# Altium PCB Potencia.PcbDoc
Units mm, origin at the board's own origin, x right, y up, seen from the top; angles counter-clockwise.
Board outline 76.45 x 85.34 mm, 2 copper layers (Top Layer, Bottom Layer); 36 components, 18 nets, 89 pads, 0 vias.
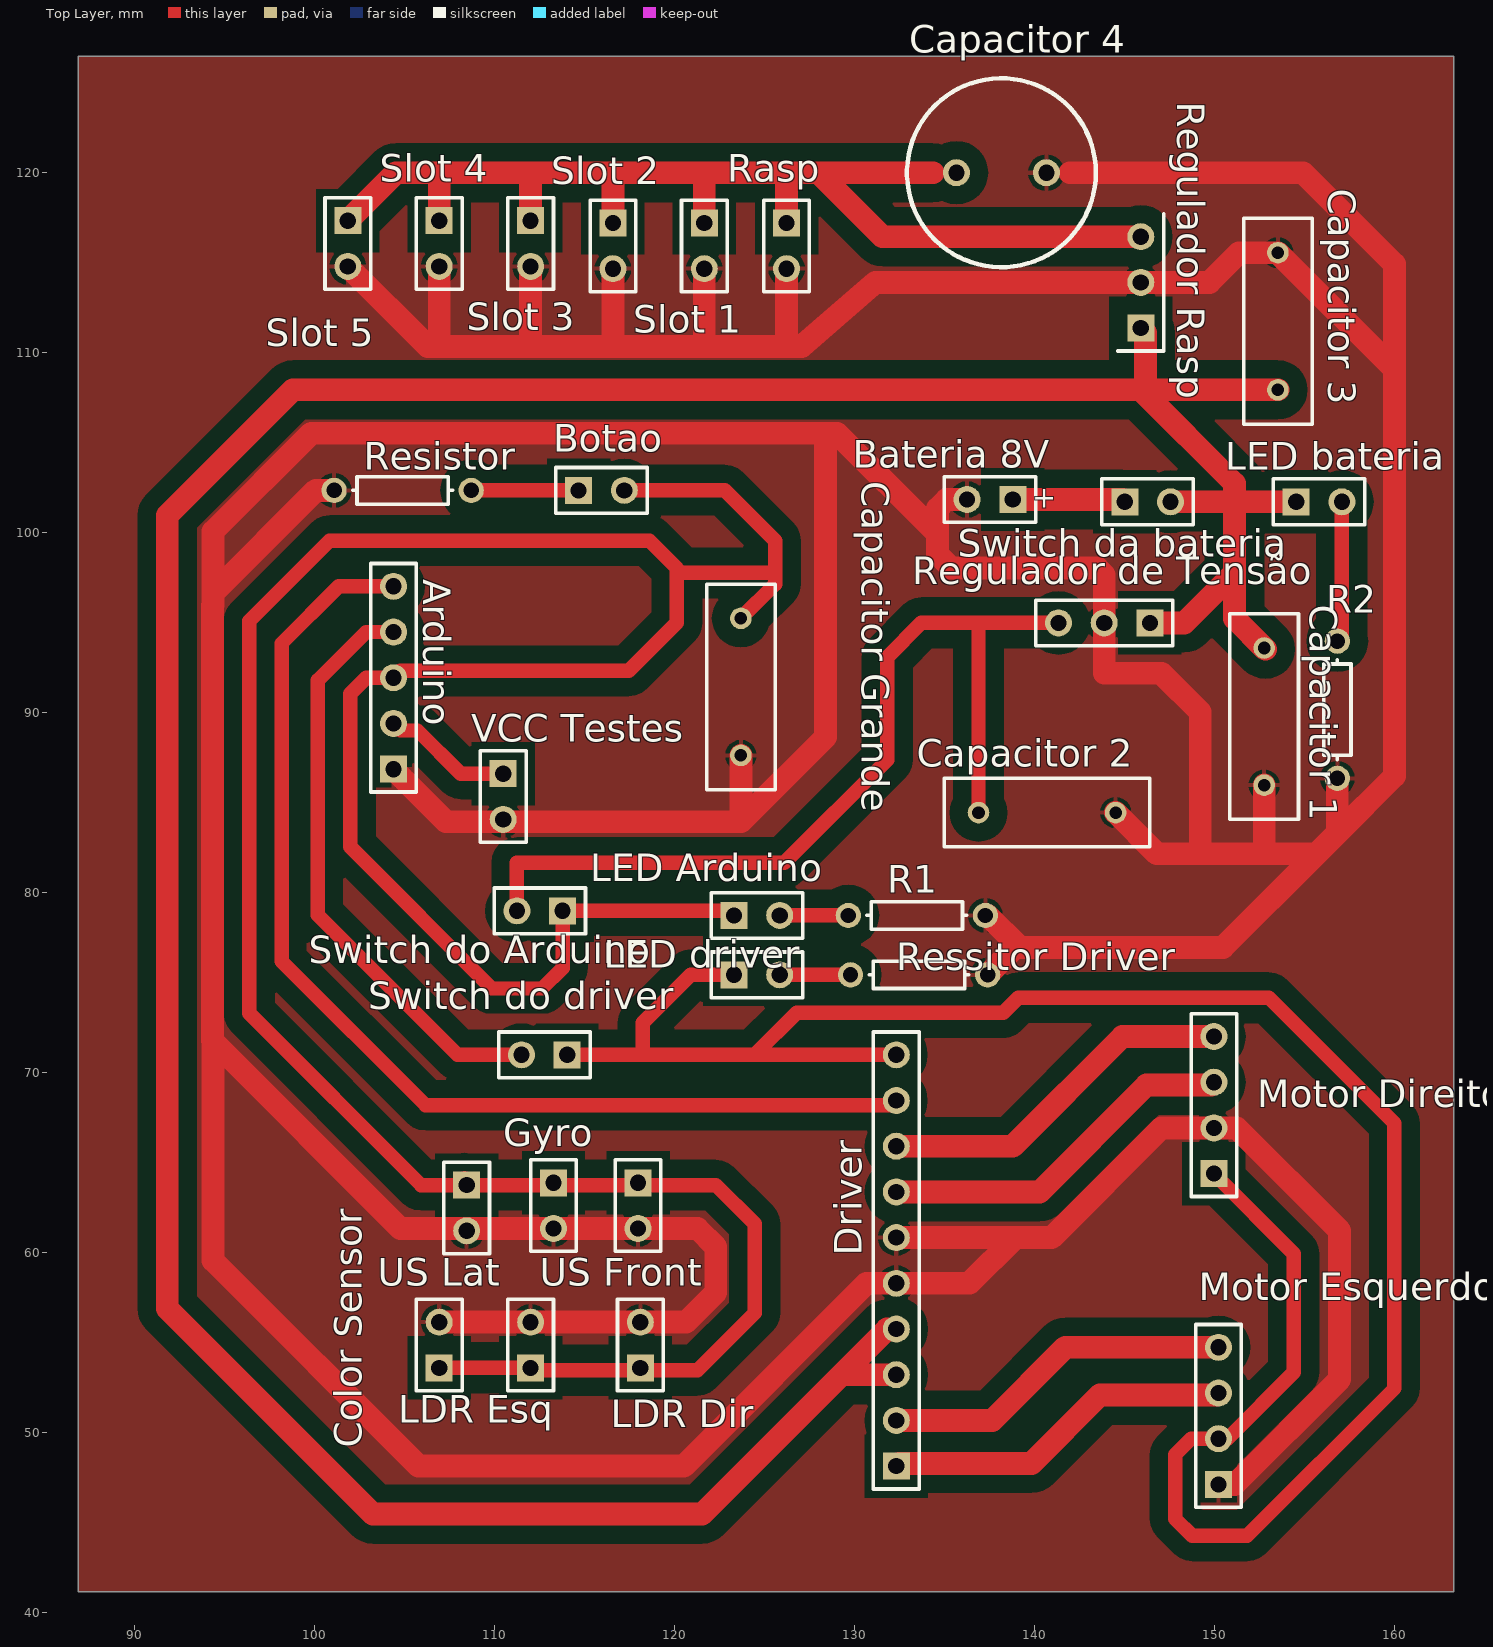
[diagram p0: Top Layer view]
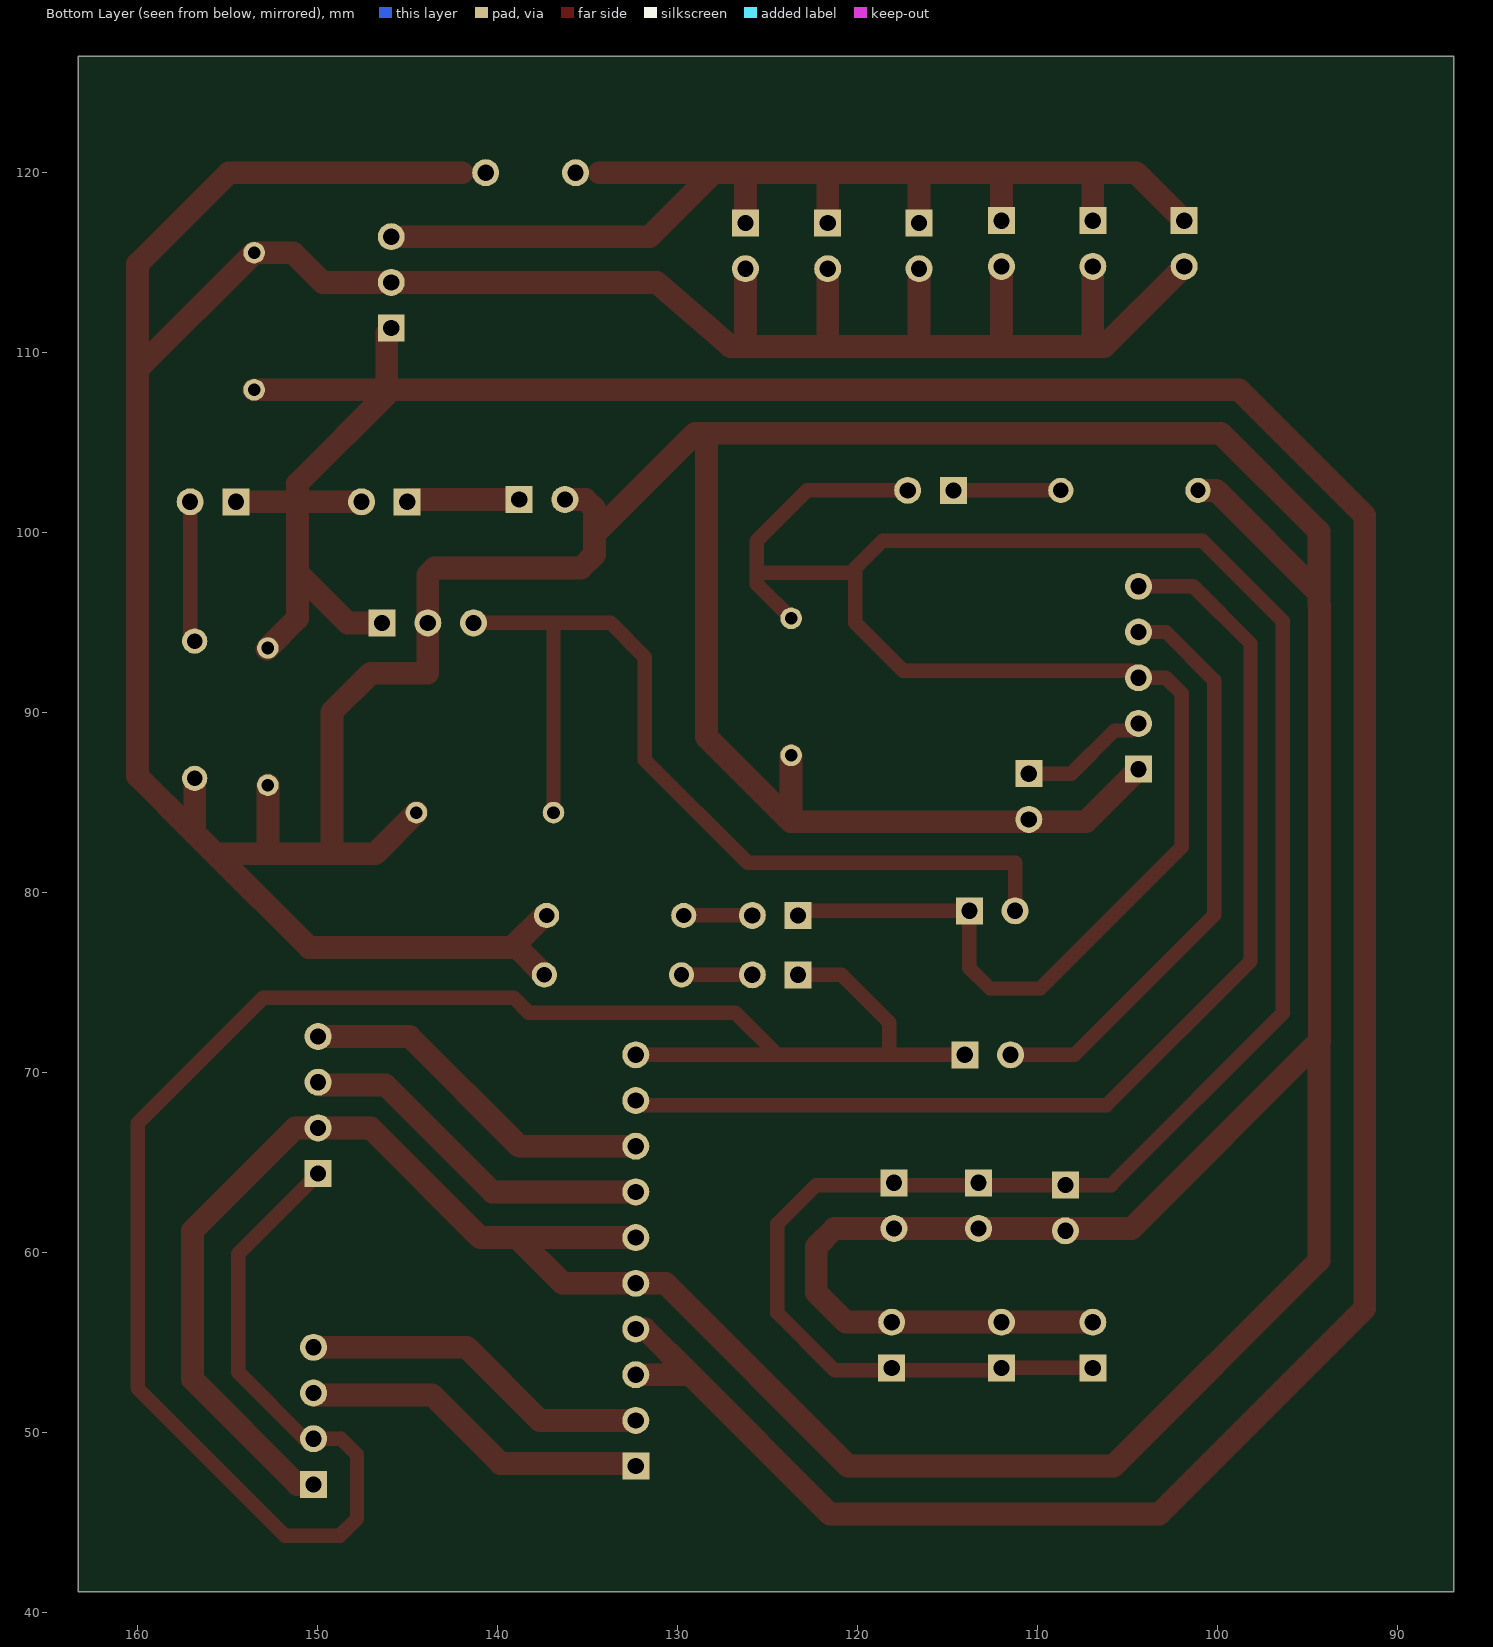
[diagram p1: Bottom Layer view, seen from below]

## Layer stack, top to bottom
Top Solder: solder mask 0.0102, Solder Resist, Dk 3.5
Top Layer: signal copper 0.0356
Dielectric 1: dielectric 0.32, FR-4, Dk 4.8
Bottom Layer: signal copper 0.0356
Bottom Solder: solder mask 0.0102, Solder Resist, Dk 3.5

## Board outline
86.868,41.148 163.322,41.148 163.322,126.492 86.868,126.492

## Design rules (kind name [scope] priority, off if disabled: settings)
Clearance [All] p1: gap=1
PolygonConnect [All] p1: connectstyle=Relief reliefconductorwidth=0.254 reliefentries=4 polygonreliefangle="90 Angle" airgapwidth=0.254
RoutingLayers [All] p1: top layer_v5=TRUE bottom layer_v5=FALSE
RoutingVias [All] p1: holewidth=0.711 width=1.27 viastyle="Through Hole" minholewidth=0.711 minwidth=1.27 maxholewidth=0.711 maxwidth=1.27
SolderMaskExpansion [All] p1: expansion=0.102
UnpouredPolygon [All] p1: allowunpoured=FALSE
Width [All] p1: maxlimit=1.27 minlimit=0.254 preferedwidth=0.254 bottomlayer_maxwidth=0.254 minimp=50.000000 maximp=50.000000 favimp=50.000000
28 further rules are at their usual default settings.

## Classes and differential pairs
component class Potencia: Arduino "Bateria 8V" Botao "Capacitor 1" "Capacitor 2" "Capacitor 3" "Capacitor 4" "Capacitor Grande" "LED Arduino" "LED bateria" "LED driver" "Left Motor" "Motor Direito" "Motor Esquerdo" R1 R2 Rasp "Regulador de Tensão" "Regulador Rasp" Resistor "Ressitor Driver" "Right Motor" "Slot 1" "Slot 2" "Slot 3" "Slot 4" "Slot 5" "Switch da bateria" "Switch do Arduino" "Switch do driver" "VCC Testes"

## Components (designator, comment, footprint, x,y, rotation, side; value= is the part's Value field where it differs from the comment)
Arduino "Header 5" HDR1X5 104.394,86.868 r90 top (schematic designator "Alimentacao Arduino")
"Bateria 8V" "Battery" BAT-2 137.541,101.854 r180 top
Botao "Header 2" HDR1X2 114.681,102.362 r0 top (schematic designator Botão)
"Capacitor 1" "Cap" RAD-0.3 152.781,89.789 r270 top
"Capacitor 2" "Cap" RAD-0.3 140.716,84.455 r0 top
"Capacitor 3" "Cap" RAD-0.3 153.543,111.76 r90 top
"Capacitor 4" "Cap" RB5-10.5 138.176,120.015 r0 top
"Capacitor Grande" "Cap" RAD-0.3 123.698,91.44 r270 top (schematic designator "Capacitor Parrudao")
"Color Sensor" "Header 2" HDR1X2 106.934,53.594 r90 top (schematic designator "Sensor de Cores")
Driver "Header 10" HDR1X10 132.334,48.133 r90 top
Gyro "Header 2" HDR1X2 113.284,63.881 r270 top (schematic designator Giroscópio)
"LDR Dir" "Header 2" HDR1X2 118.11,53.594 r90 top (schematic designator "LDR Direito")
"LDR Esq" "Header 2" HDR1X2 112.014,53.594 r90 top (schematic designator "LDR Esquerdo")
"LED Arduino" "Header 2" HDR1X2 123.317,78.74 r0 top
"LED bateria" "Header 2" HDR1X2 154.559,101.727 r0 top
"LED driver" "Header 2" HDR1X2 123.317,75.438 r0 top
"Motor Direito" "Header 4" HDR1X4 149.987,64.389 r90 top
"Motor Esquerdo" "Header 4" HDR1X4 150.241,47.117 r90 top
R1 "Res1" AXIAL-0.3 133.477,78.74 r0 top
R2 "Res1" AXIAL-0.3 156.845,90.17 r270 top
Rasp "Header 2" HDR1X2 126.238,117.221 r270 top
"Regulador de Tensão" "Header 3" HDR1X3 146.431,94.996 r180 top
"Regulador Rasp" "Header 3" HDR1X3 145.923,111.379 r90 top
Resistor "Res1" AXIAL-0.3 104.902,102.362 r0 top
"Ressitor Driver" "Res1" AXIAL-0.3 133.604,75.438 r0 top
"Slot 1" "Header 2" HDR1X2 121.666,117.221 r270 top
"Slot 2" "Header 2" HDR1X2 116.586,117.221 r270 top
"Slot 3" "Header 2" HDR1X2 112.014,117.348 r270 top
"Slot 4" "Header 2" HDR1X2 106.934,117.348 r270 top
"Slot 5" "Header 2" HDR1X2 101.854,117.348 r270 top
"Switch da bateria" "Header 2" HDR1X2 145.034,101.727 r0 top
"Switch do Arduino" "Header 2" HDR1X2 113.792,78.994 r180 top
"Switch do driver" "Header 2" HDR1X2 114.046,70.993 r180 top
"US Front" "Header 2" HDR1X2 117.983,63.881 r270 top (schematic designator "Ultrassom Frontal")
"US Lat" "Header 2" HDR1X2 108.458,63.754 r270 top (schematic designator "Ultrassom Lateral")
"VCC Testes" "Header 2" HDR1X2 110.49,86.614 r270 top

## Footprints (in the part's own frame and the unit in brackets; to place one, negate y for a bottom-side part, rotate by r counter-clockwise, add the part's x,y. Pads: shape width x height; smd on the part's side, far side on the other; paste and mask are expansions set on the pad)
AXIAL-0.3 [mm] "Axial Device, Thru-Hole; 2 Leads; 0.3 in Pin Spacing"
  round 1.4 hole 0.85: 1(-3.81,0) 2(3.81,0)
  silkscreen extent -2.77,-0.76 2.77,0.76
BAT-2 [mm] "Battery; 2 Leads"
  rect 1.5x1.5 hole 0.9: 1(-1.27,0)
  round 1.5 hole 0.9: 2(1.27,0)
  silkscreen extent -2.54,-1.27 2.54,1.27
HDR1X2 [mm] "Connector; Header; 2 Position"
  rect 1.5x1.5 hole 0.9: 1(0,0)
  round 1.5 hole 0.9: 2(2.54,0)
  silkscreen extent -1.27,-1.27 3.81,1.27
HDR1X3 [mm] "Connector; Header; 3 Position"
  rect 1.5x1.5 hole 0.9: 1(0,0)
  round 1.5 hole 0.9: 2(2.54,0) 3(5.08,0)
  silkscreen extent -1.27,-1.27 6.35,1.27
HDR1X4 [mm] "Connector; Header; 4 Position"
  rect 1.5x1.5 hole 0.9: 1(0,0)
  round 1.5 hole 0.9: 2(2.54,0) 3(5.08,0) 4(7.62,0)
  silkscreen extent -1.27,-1.27 8.89,1.27
HDR1X5 [mm] "Connector; Header; 5 Position"
  rect 1.5x1.5 hole 0.9: 1(0,0)
  round 1.5 hole 0.9: 2(2.54,0) 3(5.08,0) 4(7.62,0) 5(10.16,0)
  silkscreen extent -1.27,-1.27 11.43,1.27
HDR1X10 [mm] "Connector; Header; 10 Position"
  rect 1.5x1.5 hole 0.9: 1(0,0)
  round 1.5 hole 0.9: 2(2.54,0) 3(5.08,0) 4(7.62,0) 5(10.16,0) 6(12.7,0) 7(15.24,0) 8(17.78,0) 9(20.32,0) 10(22.86,0)
  silkscreen extent -1.27,-1.27 24.13,1.27
RAD-0.3 [mm] "Radial Cap, Thru-Hole; 2 Leads; 0.3 in Pin Spacing"
  round 1.2 hole 0.7: 1(-3.81,0) 2(3.81,0)
  silkscreen extent -5.71,-1.91 5.71,1.91
RB5-10.5 [mm] "Capacitor (Radial); 2 Leads"
  round 1.5 hole 0.9: 1(-2.5,0) 2(2.5,0)
  silkscreen extent -5.25,-5.25 5.25,5.25

## Part data
Arduino: "Header, 5-Pin"
"Bateria 8V": "Multicell Battery"
Botao "Color Sensor" Gyro "LDR Dir" "LDR Esq" "LED Arduino" "LED bateria" "LED driver" Rasp "Slot 1" "Slot 2" "Slot 3" "Slot 4" "Slot 5" "Switch da bateria" "Switch do Arduino" "Switch do driver" "US Front" "US Lat" "VCC Testes": "Header, 2-Pin"
"Capacitor 1" "Capacitor 2" "Capacitor 3" "Capacitor 4" "Capacitor Grande": "Capacitor"
Driver: "Header, 10-Pin"
"Motor Direito" "Motor Esquerdo": "Header, 4-Pin"
R1 R2 Resistor "Ressitor Driver": "Resistor"
"Regulador de Tensão" "Regulador Rasp": "Header, 3-Pin"

## Nets (pads, with @x,y where several pads share a name; then routed paths per layer and width w, separated by ;. In a path a pad name is that pad's centre, name@x,y a point inside that pad or via, vN(x,y) a via of type N, cw(c..) or ccw(c..) an arc to the next point about the centre after c; other vN are vias at no path point)
"CAPACITOR 1": "Capacitor 1.1" "Capacitor 3.1" "LED bateria.1" "Regulador de Tensão.1" "Regulador Rasp.1" "Switch da bateria.2" Driver.3 Driver.4 | length 194.1
  Top Layer w1.27: Driver.4@131.826,55.753 129.286,53.213 ; Driver.3 129.286,53.213 ; 145.923,111.379 146.177,111.125 146.177,107.95 153.543,107.95 ; 146.431,94.996 148.336,94.996 151.13,97.79 ; 147.574,101.727 151.13,101.727 ; 152.844,93.535 151.13,95.25 151.13,97.79 ; 154.559,101.727 151.13,101.727 ; 129.286,53.213 121.539,45.466 103.251,45.466 91.821,56.896 91.821,100.965 98.806,107.95 145.923,107.95 151.13,102.743 151.13,101.727 ; 151.13,97.79 151.13,101.727
"CAPACITOR 2": "Capacitor 2.1" "Regulador de Tensão.3" "Switch do Arduino.2" | length 52.8
  Top Layer w0.254: 110.871,79.375 111.252,78.994
  Top Layer w0.635: 136.906,94.742 137.16,94.996
  Top Layer w0.8: 111.252,78.994 111.252,81.661 126.111,81.661 131.826,87.376 131.826,93.091 133.731,94.996 137.16,94.996 141.351,94.996 ; 136.906,84.455 136.906,89.027 136.906,94.742
"CAPACITOR 4": "Capacitor 4.1" "Regulador Rasp.3" "Slot 1.1" "Slot 2.1" "Slot 3.1" "Slot 4.1" "Slot 5.1" Rasp.1 | length 66.1
  Top Layer w1.27: 101.854,117.348 104.521,120.015 116.586,120.015 ; 106.807,119.888 106.934,119.761 106.934,117.348 ; 112.014,117.348 112.014,119.634 ; 116.586,117.221 116.586,120.015 ; 121.666,117.221 121.666,119.888 ; Rasp.1 126.238,120.015 ; 134.366,120.015 128.016,120.015 ; 145.923,116.459 131.572,116.459 128.016,120.015 ; 116.586,120.015 126.238,120.015 ; 126.238,120.015 128.016,120.015
"CAPACITOR PARRUDAO": "Capacitor Grande.1" "Color Sensor.1" "LDR Dir.1" "LDR Esq.1" "LED Arduino.1" "Switch do Arduino.1" "US Front.1" "US Lat.1" Arduino.3 Botao.2 Gyro.1 | length 183.6
  Top Layer w0.8: 106.934,53.594 112.014,53.594 ; 108.331,64.135 107.95,63.754 105.918,63.754 96.371,73.301 96.371,95.101 100.838,99.568 118.618,99.568 120.142,98.044 120.142,94.996 117.475,92.329 104.775,92.329 Arduino.3 102.876,91.948 101.981,91.053 101.981,82.55 109.855,74.676 112.649,74.676 113.792,75.819 113.792,78.994 123.063,78.994 ; 108.458,63.754 122.301,63.754 124.46,61.595 124.46,56.642 121.285,53.467 112.141,53.467 ; Botao.2 122.809,102.362 125.603,99.568 125.603,97.155 123.698,95.25 ; 120.142,97.79 125.095,97.79
GND1: "Bateria 8V.2" "Capacitor 1.2" "Capacitor 2.2" "Capacitor 3.2" "Capacitor 4.2" "Capacitor Grande.2" "Color Sensor.2" "LDR Dir.2" "LDR Esq.2" "Motor Direito.2" "Motor Esquerdo.1" "Regulador de Tensão.2" "Regulador Rasp.2" "Ressitor Driver.2" "Slot 1.2" "Slot 2.2" "Slot 3.2" "Slot 4.2" "Slot 5.2" "US Front.2" "US Lat.2" "VCC Testes.2" Arduino.1 Driver.5 Driver.6 Gyro.2 R1.2 R2.2 Rasp.2 Resistor.1 | length 508.7
  Top Layer w1.27: Resistor.1 100.076,102.362 94.361,96.647 ; 101.854,114.808 106.299,110.363 127.078,110.363 131.181,113.919 149.733,113.919 151.384,115.57 153.543,115.57 160.02,109.093 ; Arduino.1 107.315,83.947 123.698,83.947 ; 106.934,56.134 112.014,56.134 118.11,56.134 120.65,56.134 122.301,57.785 122.301,60.325 121.285,61.341 104.775,61.341 94.361,71.755 ; 106.934,110.998 106.934,114.808 ; 112.014,111.125 112.014,114.808 ; 116.586,110.871 116.586,114.681 ; 121.666,110.49 121.666,114.681 ; 123.698,87.63 123.698,83.947 ; 126.238,110.49 Rasp.2 ; 128.397,105.156 128.397,88.646 123.698,83.947 ; Driver.6 138.938,60.833 ; 136.271,101.854 135.128,101.854 134.62,101.346 134.62,99.949 ; R1.2 137.414,78.74 139.192,76.962 ; 137.414,75.438 138.938,76.962 150.495,76.962 155.702,82.169 ; 141.986,120.015 154.94,120.015 160.02,114.935 160.02,109.093 ; 144.526,84.455 146.812,82.169 149.225,82.169 ; 151.13,47.117 156.972,52.959 156.972,61.214 151.257,66.929 149.987,66.929 147.066,66.929 140.97,60.833 138.938,60.833 ; 152.781,82.677 152.781,85.979 ; R2.2 156.845,83.312 ; 94.361,71.755 94.361,59.563 105.791,48.133 120.523,48.133 130.683,58.293 Driver.5 136.398,58.293 138.938,60.833 ; 94.361,71.755 94.336,71.78 94.336,95.969 94.361,95.994 94.361,96.647 ; 94.361,96.647 94.361,100.076 99.822,105.537 129.032,105.537 134.62,99.949 ; 134.62,99.949 134.62,98.806 135.382,98.044 143.51,98.044 143.891,97.663 143.891,94.996 143.891,92.202 147.066,92.202 149.225,90.043 149.225,82.169 ; 149.225,82.169 155.702,82.169 ; 155.702,82.169 156.845,83.312 ; 156.845,83.312 160.02,86.487 160.02,109.093
GNDLOGIC: Arduino.5 Driver.9 | length 62.4
  Top Layer w0.8: Arduino.5 101.346,97.028 98.171,93.853 98.171,76.2 106.172,68.199 Driver.9@132.08,68.199
"LED DO DRIVER": "LED driver.1" "Motor Direito.1" "Motor Esquerdo.2" "Switch do driver.1" Driver.10 | length 121.3
  Top Layer w0.8: 114.427,70.993 118.237,70.993 ; 123.317,75.438 120.904,75.438 118.237,72.771 118.237,70.993 ; Driver.10 124.453,70.993 ; 149.987,64.389 154.432,59.944 154.432,53.347 150.742,49.657 150.241,49.657 148.717,49.657 147.828,48.768 147.828,45.212 148.78,44.259 151.828,44.259 160.02,52.451 160.02,67.183 153.044,74.159 139.105,74.159 138.284,73.338 126.798,73.338 124.453,70.993 ; 118.237,70.993 124.453,70.993
M1A: "Motor Direito.4" Driver.8 | length 20.4
  Top Layer w0: Driver.8 Driver.8@132.489,66.068
  Top Layer w1.27: Driver.8 138.811,65.913 144.907,72.009 149.987,72.009
M1B: "Motor Direito.3" Driver.7 | length 20.2
  Top Layer w1.27: Driver.7 140.3,63.373 146.241,69.314 149.832,69.314 149.987,69.469
M2A: "Motor Esquerdo.4" Driver.2 | length 19.6
  Top Layer w1.27: Driver.2 137.668,50.673 141.732,54.737 150.241,54.737
M2B: "Motor Esquerdo.3" Driver.1 | length 19.6
  Top Layer w1.27: Driver.1 132.489,48.288 139.855,48.288 143.649,52.082 150.126,52.082 150.241,52.197
NetArduino_4: "Switch do driver.2" Arduino.4 | length 32.9
  Top Layer w0.8: Arduino.4 102.87,94.488 100.181,91.799 100.181,78.762 107.95,70.993 111.506,70.993
"NetBateria 8V_1": "Bateria 8V.1" "Switch da bateria.1" | length 6.1
  Top Layer w1.27: 138.811,101.854 144.907,101.854
NetBotao_1: Botao.1 Resistor.2 | length 5.6
  Top Layer w0.8: Resistor.2@109.093,102.362 Botao.1
"NetLED Arduino_2": "LED Arduino.2" R1.1 | length 3.8
  Top Layer w0.8: 125.857,78.74 R1.1
"NetLED bateria_2": "LED bateria.2" R2.1 | length 7.7
  Top Layer w0.8: R2.1@157.099,93.98 157.099,101.727
"NetLED driver_2": "LED driver.2" "Ressitor Driver.1" | length 3.9
  Top Layer w0.8: 125.857,75.438 129.794,75.438
VCCEXTRA: "VCC Testes.1" Arduino.2 | length 7.3
  Top Layer w0.8: Arduino.2 104.784,89.018 105.724,89.018 108.128,86.614 110.49,86.614

## Polygon pours and split planes (outlines as drawn)
GND1 on Top Layer "GND plane" (solid, pour order 4): 86.868,126.492 86.868,41.148 163.322,41.148 163.322,126.492

## Text inside footprints (layer, text, board x,y; h text height)
"Bateria 8V": Top Overlay "+" at 141.211,102.431 h1.15 r180